# EAGLE board Line PCB v33 (EAGLE 9.7.0)
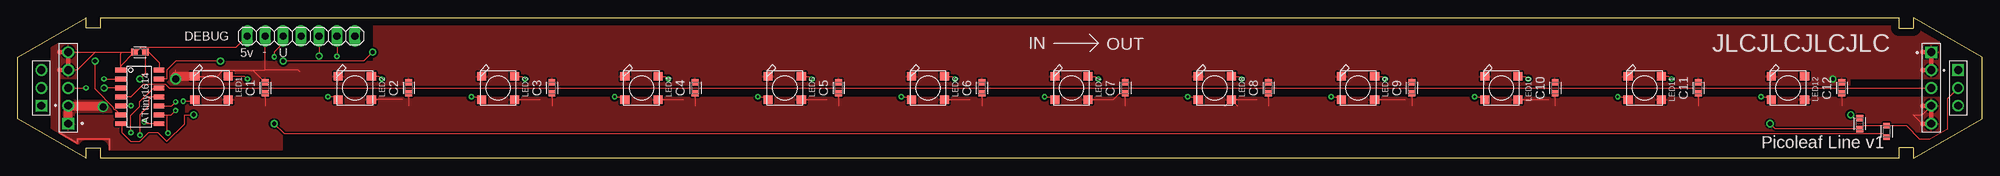
[diagram p0: board, top side]
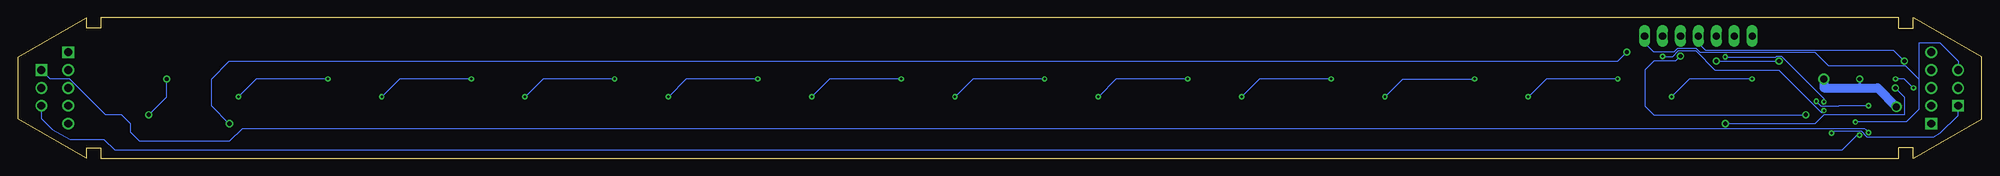
[diagram p1: board, bottom side, seen from below]

Size 278.5 x 20 mm. Coordinates in mm from the lower left corner, seen from the top.
Outline: 268.75,1.5 268.75,0 278.5,5.63 278.5,14.37 268.75,20 268.75,18.5 266.75,18.5 266.75,20 11.75,20 11.75,18.5 9.75,18.5 9.75,20 0,14.37 0,5.63 9.75,0 9.75,1.5 11.75,1.5 11.75,0 266.75,0 266.75,1.5 268.75,1.5
Copper layers (1*16): Top 0.035mm / dielectric 1.5mm / Bottom 0.035mm
Design rules "default": minimum track width 6mil, minimum drill 0.35mm, track to track 6mil, track to pad 6mil, pad to pad 6mil, via to via 6mil, smd to smd 6mil, copper to edge 40mil, drill to drill 6mil, minimum pad ring 10mil, minimum via ring 8mil, stop-mask expansion 4mil, vias tented up to drill 0mil, thermal gap 10mil

## Footprints (pad centres in the part's own frame; a part is rotated, then mirrored left to right if it is on the bottom)
CAPC1608X85 = smd 0.921 x 0.97: 1 -0.775,0; 2 0.775,0
1X07 = drill 1.016 long: 1 -7.62,0; 2 -5.08,0; 3 -2.54,0; 4 0,0; 5 2.54,0; 6 5.08,0; 7 7.62,0
SOIC127P600X175-14N = smd 1.525 x 0.7: 1 -2.712,3.81; 2 -2.712,2.54; 3 -2.712,1.27; 4 -2.712,0; 5 -2.712,-1.27; 6 -2.712,-2.54; 7 -2.712,-3.81; 8 2.712,-3.81; 9 2.712,-2.54; 10 2.712,-1.27; 11 2.712,0; 12 2.712,1.27; 13 2.712,2.54; 14 2.712,3.81
61300311121 = drill 1.1 square: 1 -2.54,0 | drill 1.1: 2 0,0; 3 2.54,0
61300511121 = drill 1.1 square: 1 -5.08,0 | drill 1.1: 2 -2.54,0; 3 0,0; 4 2.54,0; 5 5.08,0
WS2812B-NARROW = smd 1.3 x 1.2: 1-VDD 2.35,-1.65; 2-DOUT 2.35,1.65; 3-GND -2.35,1.65; 4-DIN -2.35,-1.65
RESC1608X60 = smd 0.799 x 0.974: 1 -0.815,0; 2 0.815,0

## Placement (x,y rotation side)
C1  0.1uf  [CAPC1608X85]  35.11,10 90 top
C2  0.1uf  [CAPC1608X85]  55.43,10 90 top
C3  0.1uf  [CAPC1608X85]  75.75,10 90 top
C4  0.1uf  [CAPC1608X85]  96.07,10 90 top
C5  0.1uf  [CAPC1608X85]  116.39,10 90 top
C6  0.1uf  [CAPC1608X85]  136.71,10 90 top
C7  0.1uf  [CAPC1608X85]  157.03,10 90 top
C8  0.1uf  [CAPC1608X85]  177.35,10 90 top
C9  0.1uf  [CAPC1608X85]  197.67,10 90 top
C10  0.1uf  [CAPC1608X85]  217.99,10 90 top
C11  0.1uf  [CAPC1608X85]  238.31,10 90 top
C12  0.1uf  [CAPC1608X85]  258.63,10 90 top
C13  0.1uf  [CAPC1608X85]  17.33,15.08 180 top
C14  [CAPC1608X85]  261.17,4.92 90 top
DEBUG  PINHD-1X7  [1X07]  40.19,17.38 0 top
IC1  ATTINY1614-SSN  [SOIC127P600X175-14N]  17.33,8.73 0 top
IN-3PIN  61300311121  [61300311121]  3.36,10 90 top
IN-5PIN  61300511121  [61300511121]  7.17,10 90 top
LED1  WS2812B_5050N  [WS2812B-NARROW]  27.49,10 0 top
LED2  WS2812B_5050N  [WS2812B-NARROW]  47.81,10 0 top
LED3  WS2812B_5050N  [WS2812B-NARROW]  68.13,10 0 top
LED4  WS2812B_5050N  [WS2812B-NARROW]  88.45,10 0 top
LED5  WS2812B_5050N  [WS2812B-NARROW]  108.77,10 0 top
LED6  WS2812B_5050N  [WS2812B-NARROW]  129.09,10 0 top
LED7  WS2812B_5050N  [WS2812B-NARROW]  149.41,10 0 top
LED8  WS2812B_5050N  [WS2812B-NARROW]  169.73,10 0 top
LED9  WS2812B_5050N  [WS2812B-NARROW]  190.05,10 0 top
LED10  WS2812B_5050N  [WS2812B-NARROW]  210.37,10 0 top
LED11  WS2812B_5050N  [WS2812B-NARROW]  230.69,10 0 top
LED12  WS2812B_5050N  [WS2812B-NARROW]  251.01,10 0 top
OUT-3PIN  61300311121  [61300311121]  275.14,10 270 top
OUT-5PIN  61300511121  [61300511121]  271.33,10 270 top
R3  10M  [RESC1608X60]  264.98,3.81 90 top

## Library data of the parts
C1-C14 = Capacitor; CATEGORY: Capacitor
DEBUG = Connector; CATEGORY: CONNECTOR; SUB-CATEGORY: PIN-HEADER
IC1 = ATtiny1614-SSN; ARROW_PART_NUMBER: ATTINY1614-SSN; ARROW_PRICE-STOCK: https://www.arrow.com/en/products/attiny1614-ssn/microchip-technology?region=nac; DESCRIPTION: 8-bit Microcontrollers - MCU 20MHz, SOIC, 85C, Green; HEIGHT: 1.75mm; MANUFACTURER_NAME: Microchip; MANUFACTURER_PART_NUMBER: ATTINY1614-SSN; MOUSER_PART_NUMBER: 556-ATTINY1614-SSN; MOUSER_PRICE-STOCK: https://www.mouser.co.uk/ProductDetail/Microchip-Technology/ATTINY1614-SSN?qs=T3oQrply3y%2FF20EnX%252BXRaw%3D%3D; SPICEPREFIX: X
IN-3PIN OUT-3PIN = Headers; CREATED_BY: PCBLayout.com; DIGI_KEY_PART_NUMBER: 732-5316-ND; MANUFACTURER: Wurth Electronics Inc.; MPN: 61300311121
IN-5PIN OUT-5PIN = Headers; CREATED_BY: PCBLayout.com; DIGI_KEY_PART_NUMBER: 732-5318-ND; MANUFACTURER: Wurth Electronics Inc.; MPN: 61300511121
LED1-LED12 = adafruit
R3 = Resistor; CATEGORY: Resistor; SUB-CATEGORY: Fixed

## Nets
5V: C1.1 C2.1 C3.1 C4.1 C5.1 C6.1 C7.1 C8.1 C9.1 C10.1 C11.1 C12.1 C13.2 DEBUG.1 IC1.1 IN-5PIN.4 IN-5PIN.5 LED1.1-VDD LED2.1-VDD LED3.1-VDD LED4.1-VDD LED5.1-VDD LED6.1-VDD LED7.1-VDD LED8.1-VDD LED9.1-VDD LED10.1-VDD LED11.1-VDD LED12.1-VDD OUT-5PIN.4 OUT-5PIN.5
CAPACITIVE-RECEIVE: C14.1 IC1.13 OUT-3PIN.2 R3.2
CAPACITIVE-SEND: IC1.3 R3.1
GND: C1.2 C2.2 C3.2 C4.2 C5.2 C6.2 C7.2 C8.2 C9.2 C10.2 C11.2 C12.2 C13.1 C14.2 DEBUG.2 IC1.14 IN-5PIN.1 IN-5PIN.2 LED1.3-GND LED2.3-GND LED3.3-GND LED4.3-GND LED5.3-GND LED6.3-GND LED7.3-GND LED8.3-GND LED9.3-GND LED10.3-GND LED11.3-GND LED12.3-GND OUT-5PIN.1 OUT-5PIN.2
LED-DATA: IC1.5 LED1.4-DIN
N$1: LED1.2-DOUT LED2.4-DIN
N$2: LED2.2-DOUT LED3.4-DIN
N$3: LED3.2-DOUT LED4.4-DIN
N$4: LED4.2-DOUT LED5.4-DIN
N$5: LED5.2-DOUT LED6.4-DIN
N$6: LED6.2-DOUT LED7.4-DIN
N$7: LED7.2-DOUT LED8.4-DIN
N$8: LED8.2-DOUT LED9.4-DIN
N$9: LED9.2-DOUT LED10.4-DIN
N$10: LED10.2-DOUT LED11.4-DIN
N$11: LED11.2-DOUT LED12.4-DIN
RXD: DEBUG.4 IC1.6
SCL-IN: DEBUG.6 IC1.9 IN-3PIN.1
SCL-OUT: IC1.12 OUT-3PIN.1
SDA-IN: DEBUG.7 IC1.8 IN-3PIN.3
SDA-OUT: IC1.11 OUT-3PIN.3
SENSE-IN: IC1.2 IN-5PIN.3
SENSE-OUT: IC1.4 OUT-5PIN.3
TXD: DEBUG.5 IC1.7
UPDI: DEBUG.3 IC1.10

## Tracks (layer width: path | path; a pad name or v marks a point on that pad's centre or on a via)
5V
  Top 0.152: C13.2 14.62,13.14 IC1.1 14.62,14.91 14.79,15.08 | IN-5PIN.5 10.98,15.08 | 10.98,15.08 14.79,15.08 | 14.79,15.08 16.84,15.08 17.55,15.79 30.98,15.79 DEBUG.1 | 54.56,8.35 LED2.1-VDD | LED3.1-VDD 74.1,8.35 | 111.5,8.73 LED5.1-VDD 114.74,8.35 | LED4.1-VDD 94.42,8.35 | LED6.1-VDD 135.06,8.35 | LED7.1-VDD 155.38,8.35 156.25,9.22 C7.1 157.03,7.46 | 171.19,7.46 LED8.1-VDD | LED8.1-VDD 175.7,8.35 | IN-5PIN.4 8.44,12.54 10.98,15.08 | 270.06,4.92 268.79,6.19 270.06,6.19 OUT-5PIN.4 | LED8.1-VDD 172.97,7.46 | LED9.1-VDD 196.8,8.35 | LED10.1-VDD 217.12,8.35 | C1.1 35.11,7.46 | C2.1 55.43,7.46 | C3.1 75.75,7.46 | C4.1 96.07,7.46 | C5.1 116.39,7.46 | C6.1 136.71,7.46 | C8.1 177.35,7.46 | C9.1 197.67,7.46 | C10.1 217.99,7.46 | C11.1 238.31,7.46 | C12.1 258.63,7.46
  Top 0.305: 5.9,12.54 5.9,3.66 8.5,2.16 8.5,2.75 13,2.75 13,1.24
  Top 0.61: 270.06,4.92 OUT-5PIN.5 OUT-5PIN.4 270.06,7.46 | 5.9,12.54 IN-5PIN.4 IN-5PIN.5 5.9,15.08
  pour Top (isolate 0.254): 5.81,11.4 5.87,11.42 8.29,11.42 8.29,16.2 4.78,16.2 4.78,-0.01 31.15,-0.01 31.15,6.04 8.59,6.04 8.59,3.62 8.57,3.56 8.53,3.52 8.47,3.5 5.87,3.5 5.81,3.52 5.77,3.56 5.75,3.62 5.75,11.3 5.77,11.36
  pour Top (isolate 0.254): 23.76,3.73 272.52,3.73 272.52,8.65 23.76,8.65
  pour Top (isolate 0.254): 30.11,1.19 37.57,1.19 37.57,4.84 30.11,4.84
CAPACITIVE-RECEIVE  (via drill 0.6)
  Top 0.152: OUT-3PIN.2 273.59,8.45 273.59,4.14 271.13,2.72 269.72,2.72 267.82,4.62 R3.2 261.65,4.62 C14.1 249.25,4.14 v248.47,4.92 | v50.35,15.08 49.08,13.81 v37.65,13.81 | v28.76,13.81 22.41,13.81 21.14,12.54 21.14,11.27 IC1.13
  Bottom 0.152: v248.47,4.92 251.01,7.46 251.01,11.27 248.47,13.81 51.62,13.81 v50.35,15.08 | v37.65,13.81 v28.76,13.81
CAPACITIVE-SEND  (via drill 0.6)
  Top 0.152: IC1.3 v12.25,10 | R3.1 264.51,3.46 37.84,3.46 v36.38,4.92
  Bottom 0.152: v12.25,10 10.98,8.73 10.98,6.19 22.41,6.19 23.68,4.92 v36.38,4.92
GND  (via drill 0.6, 1)
  Top 0.152: IC1.14 20.04,13.64 18.6,15.08 C13.1 18.11,12.04 v17.33,11.27 | C1.2 33.41,12.48 29.09,12.48 28.27,11.65 LED1.3-GND 26.03,12.54 35.11,12.54 | 35.11,12.54 DEBUG.2 | v22.41,11.27 22.41,12.54 | C14.2 260.39,5.7 v259.9,6.19 | 35.11,12.54 39.76,12.54 40.06,12.23
  Top 0.61: 270.06,15.08 OUT-5PIN.1 OUT-5PIN.2 270.06,12.54
  Top 1.27: IN-5PIN.1 IN-5PIN.2 11.96,7.46 v12.11,7.32 | v22.41,11.27 22.41,11.65 LED1.3-GND
  Bottom 0.152: v259.9,6.19 257.36,8.73 v257.36,11.27 | v17.33,11.27 17.33,10
  Bottom 1.27: v22.41,11.27 22.41,10 17.33,10 14.79,10 v12.11,7.32
  pour Top (isolate 0.254): 6.38,3.98 8.08,3.98 8.08,6.48 8.1,6.51 8.12,6.53 8.15,6.55 13.44,6.55 13.44,8.25 6.38,8.27
  pour Top (isolate 0.254): 50.41,13.77 50.39,13.75 50.37,13.73 21.22,13.73 21.22,10.08 259.82,10.08 259.82,11.29 259.84,11.31 259.86,11.33 259.88,11.35 272.52,11.35 272.52,20.08 50.43,20.08 50.43,13.79
LED-DATA  (via drill 0.35)
  Top 0.152: v16.05,7.47 IC1.5 | LED1.4-DIN 24.9,8.11 v23.47,8.11
  Bottom 0.152: v16.05,7.47 v16.06,7.46 20.28,7.46 20.34,7.4 22.77,7.4 v23.47,8.11
N$1  (via drill 0.35)
  Top 0.152: LED1.2-DOUT 32.19,11.65 v32.57,11.27 | v44,8.73 45.08,8.73 LED2.4-DIN
  Bottom 0.152: v32.57,11.27 41.46,11.27 v44,8.73
N$2  (via drill 0.35)
  Top 0.152: LED2.2-DOUT 51.24,11.65 v51.62,11.27 | v64.32,8.73 65.4,8.73 LED3.4-DIN
  Bottom 0.152: v51.62,11.27 61.78,11.27 v64.32,8.73
N$3  (via drill 0.35)
  Top 0.152: LED3.2-DOUT 71.56,11.65 v71.94,11.27 | v84.64,8.73 85.72,8.73 LED4.4-DIN
  Bottom 0.152: v71.94,11.27 82.1,11.27 v84.64,8.73
N$4  (via drill 0.35)
  Top 0.152: LED4.2-DOUT 91.88,11.65 v92.26,11.27 | v104.96,8.73 106.04,8.73 LED5.4-DIN
  Bottom 0.152: v92.26,11.27 102.42,11.27 v104.96,8.73
N$5  (via drill 0.35)
  Top 0.152: LED5.2-DOUT 112.2,11.65 v112.58,11.27 | v125.28,8.73 126.36,8.73 LED6.4-DIN
  Bottom 0.152: v112.58,11.27 122.74,11.27 v125.28,8.73
N$6  (via drill 0.35)
  Top 0.152: LED6.2-DOUT 132.52,11.65 v132.9,11.27 | v145.6,8.73 146.68,8.73 LED7.4-DIN
  Bottom 0.152: v132.9,11.27 143.06,11.27 v145.6,8.73
N$7  (via drill 0.35)
  Top 0.152: LED7.2-DOUT 152.84,11.65 v153.22,11.27 | v165.92,8.73 167,8.73 LED8.4-DIN
  Bottom 0.152: v153.22,11.27 163.38,11.27 v165.92,8.73
N$8  (via drill 0.35)
  Top 0.152: LED8.2-DOUT 173.16,11.65 v173.54,11.27 | v186.24,8.73 187.32,8.73 LED9.4-DIN
  Bottom 0.152: v173.54,11.27 183.7,11.27 v186.24,8.73
N$9  (via drill 0.35)
  Top 0.152: LED9.2-DOUT 193.48,11.65 v193.86,11.27 | v206.56,8.73 207.64,8.73 LED10.4-DIN
  Bottom 0.152: v193.86,11.27 204.02,11.27 v206.56,8.73
N$10  (via drill 0.35)
  Top 0.152: LED10.2-DOUT 213.8,11.65 v214.18,11.27 | v226.88,8.73 227.96,8.73 LED11.4-DIN
  Bottom 0.152: v214.18,11.27 224.34,11.27 v226.88,8.73
N$11  (via drill 0.35)
  Top 0.152: LED11.2-DOUT 234.12,11.65 v234.5,11.27 | v247.2,8.73 248.28,8.73 LED12.4-DIN
  Bottom 0.152: v234.5,11.27 244.66,11.27 v247.2,8.73
RXD  (via drill 0.6)
  Top 0.152: v10.98,13.81 10.98,9.83 13.63,7.18 13.63,7.02 13.76,6.88 13.93,6.88 IC1.6
  Bottom 0.152: v10.98,13.81 12.5,15.33 39.17,15.33 40.19,16.35 DEBUG.4
SCL-IN  (via drill 0.35)
  Top 0.152: IC1.9 21.14,6.19 | 21.14,6.19 21.14,3.8 21.32,3.62 v21.32,3.58 | DEBUG.6 v45.27,14.47 | 21.14,6.19 21.8,6.19 v22.41,6.8
  Bottom 0.152: v45.27,14.47 43.83,14.47 43.03,15.27 40.58,15.27 37.85,12.54 28.78,12.54 22.79,6.55 22.66,6.55 v22.41,6.8 | v21.32,3.58 21.02,3.88 17.08,3.88 16.72,3.53 16.72,3.46 16.31,3.04 6.82,3.04 5.87,3.59 3.36,6.1 IN-3PIN.1
SCL-OUT  (via drill 0.35)
  Top 0.152: v16.06,3.65 16.06,6.11 17.33,7.38 17.33,8.07 19.26,10 IC1.12
  Bottom 0.152: v16.06,3.65 16.42,4.01 16.42,4.03 16.58,4.19 246.66,4.19 248.47,2.38 261.17,2.38 262.44,3.65 262.44,4.92 263.71,6.19 266.03,6.19 271.11,11.27 273.87,11.27 OUT-3PIN.1
SDA-IN  (via drill 0.35)
  Top 0.152: IC1.8 18.19,4.92 v17.94,5.17
  Bottom 0.152: 8.95,11.27 8.95,16.35 5.9,16.35 3.36,13.81 IN-3PIN.3 | 8.95,11.27 8.95,6.95 10.73,5.17 v17.94,5.17 | 8.95,11.27 10.76,13.08 21.68,13.08 23.62,15.02 39.9,15.02 40.45,15.58 43.16,15.58 43.66,15.08 46.54,15.08 47.81,16.35 DEBUG.7
SDA-OUT  (via drill 0.35)
  Top 0.152: IC1.11 18.6,8.73 18.6,7.46 17.33,6.19 v17.33,3.28
  Bottom 0.152: v17.33,3.28 17.7,3.28 19.81,1.17 264.77,1.17 266.27,2.67 271.03,2.67 273.59,4.14 275.14,5.7 OUT-3PIN.3
SENSE-IN  (via drill 0.35)
  Top 0.152: IN-5PIN.3 v9.71,10 | v12.25,11.27 IC1.2
  Bottom 0.152: v9.71,10 10.98,11.27 v12.25,11.27
SENSE-OUT
  Top 0.152: OUT-5PIN.3 21.48,10 20.9,10.58 17.91,10.58 16.06,8.73 IC1.4
TXD  (via drill 0.6)
  Top 0.152: IC1.7 14.79,4.75 14.79,3.65 16.06,2.38 17.33,2.38 18.6,3.65 19.87,3.65 21.14,2.38 23.68,4.92 23.68,6.19 v24.95,6.19 | DEBUG.5 v42.73,14.54
  Bottom 0.152: v24.95,6.19 46.54,6.19 47.81,7.46 47.81,12.54 46.54,13.81 43.46,13.81 v42.73,14.54
UPDI  (via drill 0.35)
  Top 0.152: DEBUG.3 37.65,16.35 36.38,15.08 v36.38,14.42 | IC1.10 21.86,7.46 v22.41,8.01
  Bottom 0.152: v36.38,14.42 29.19,14.42 29.06,14.54 28.46,14.54 22.41,8.5 v22.41,8.01

## Text on the board
tNames: IN | OUT | JLCJLCJLCJLC | 5v | - | U | Picoleaf Line v1